# EAGLE board rev10 (EAGLE 7.5.0)
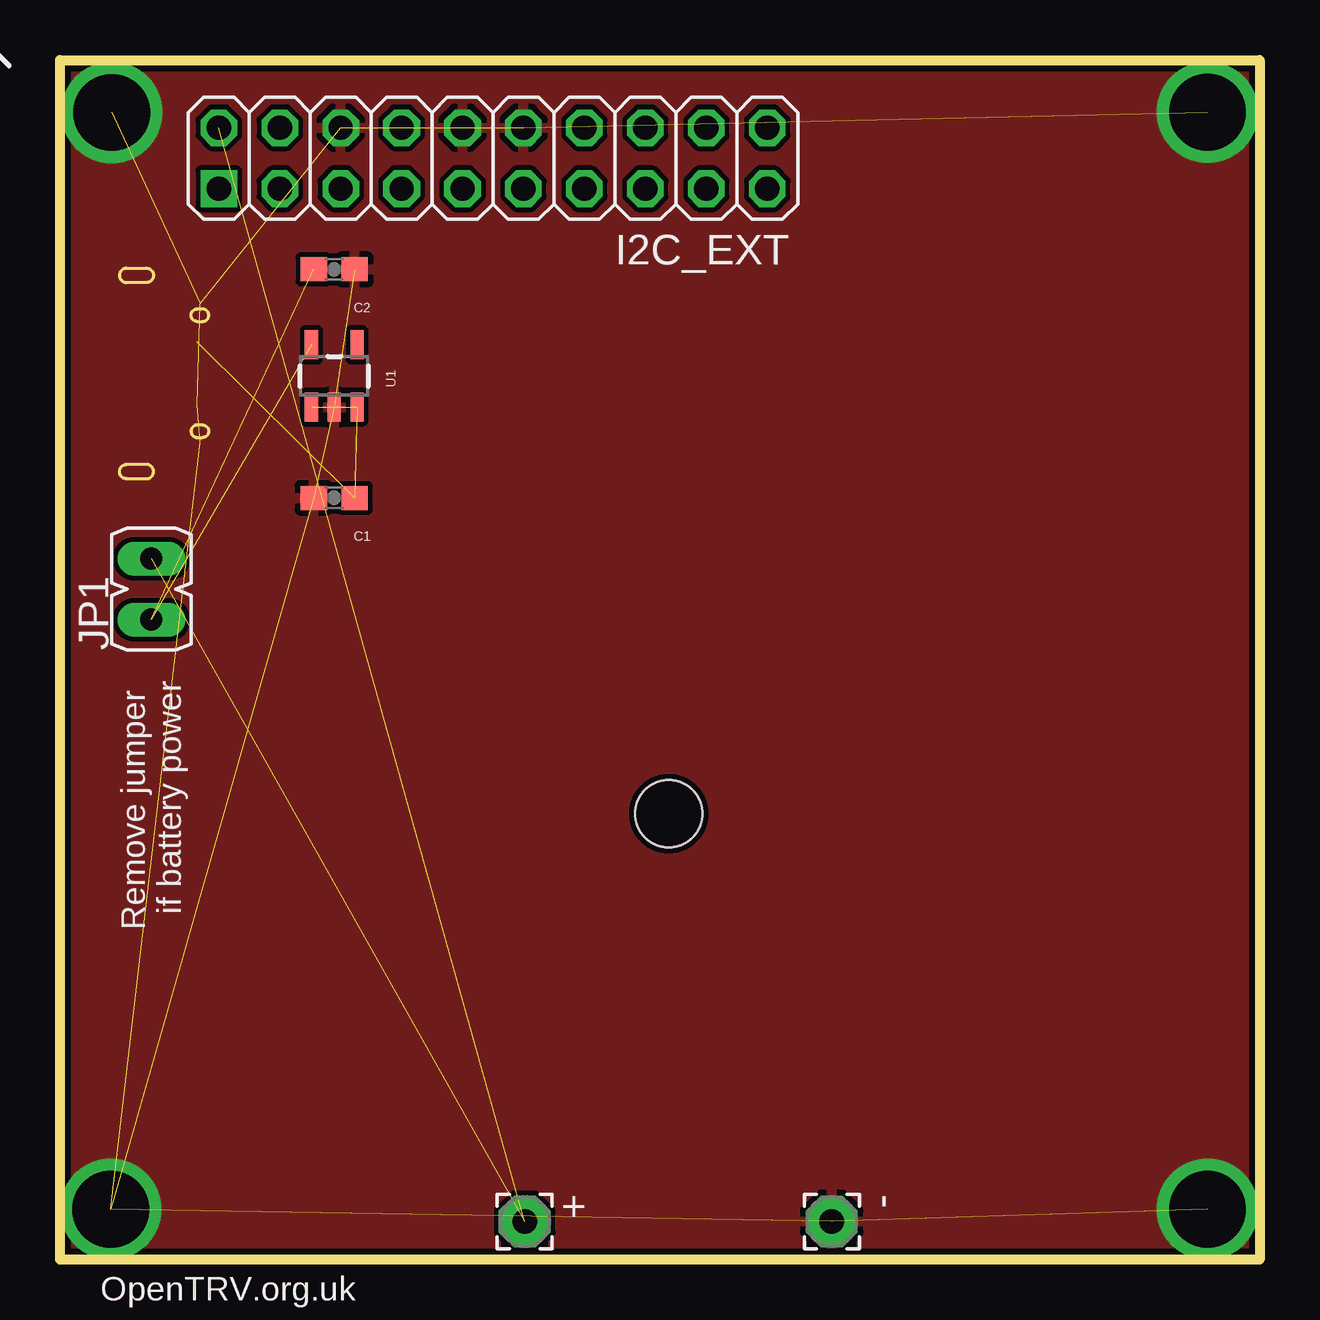
[diagram p0: board, top side]
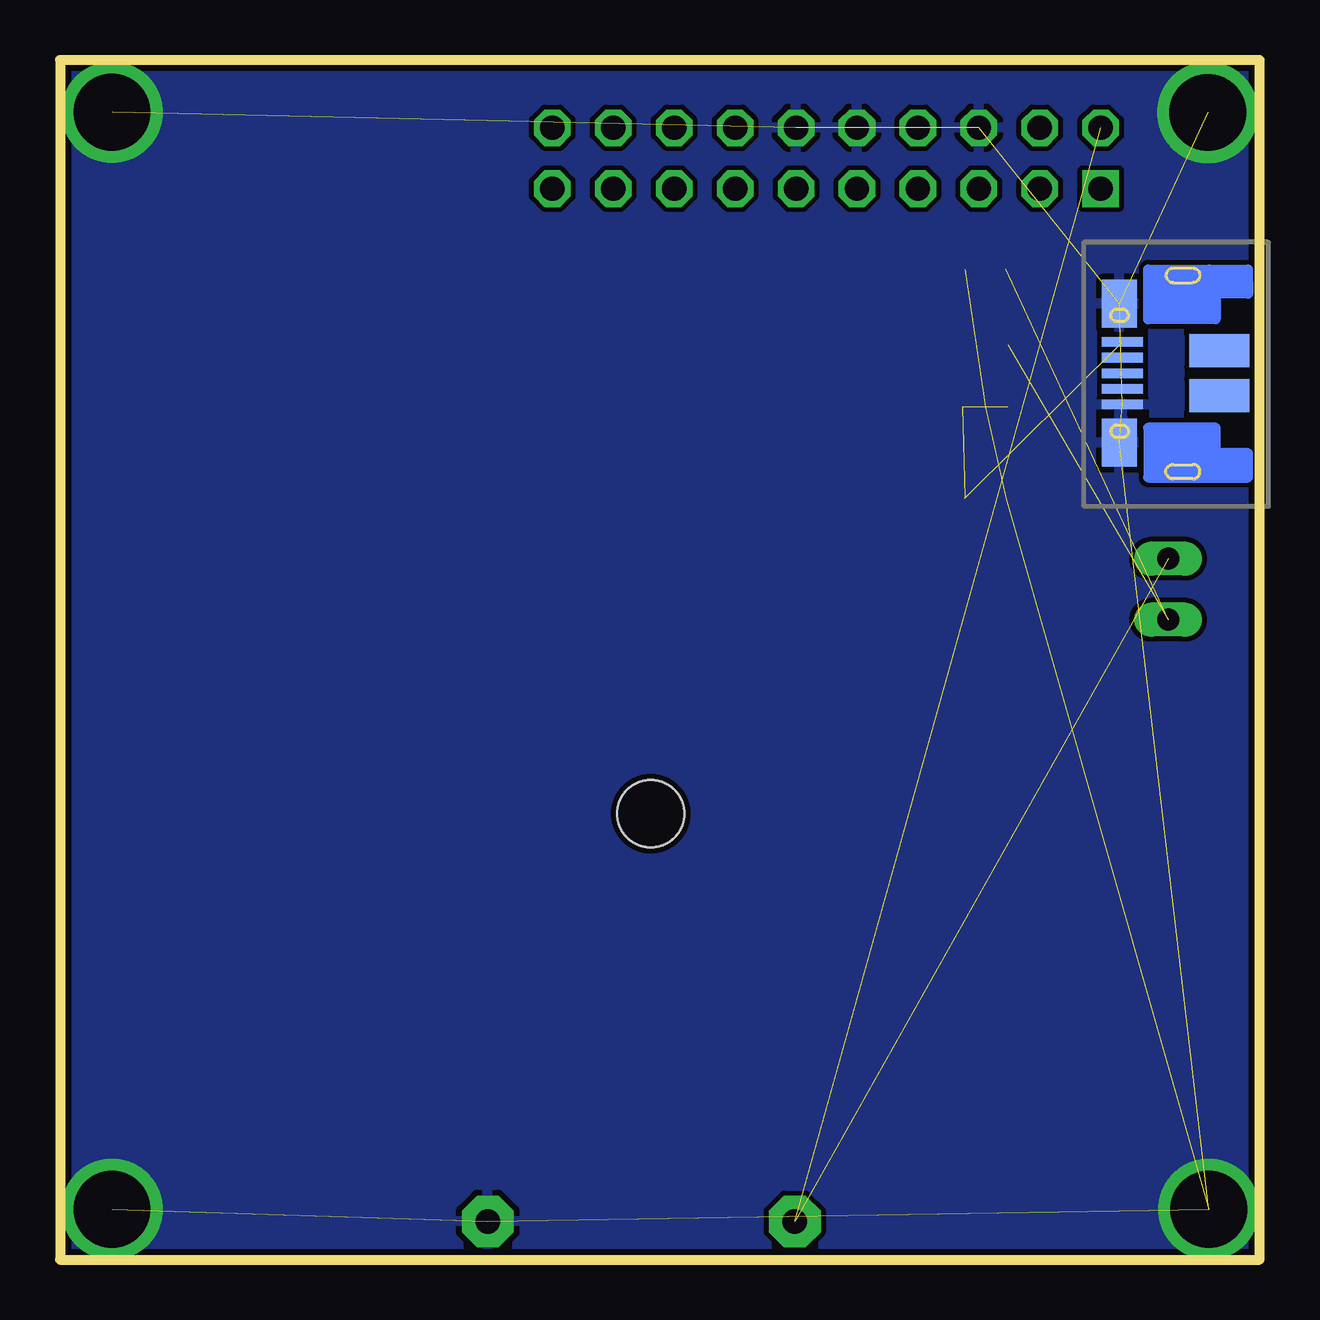
[diagram p1: board, bottom side, seen from below]

Size 50 x 50 mm. Coordinates in mm from the lower left corner, seen from the top.
Outline: 0,0 0,50 50,50 50,0 0,0
Copper layers (1*16): Top 0.035mm / dielectric 1.5mm / Bottom 0.035mm
Design rules "PMServicesStd *": minimum track width 8mil, minimum drill 0.5mm, track to track 8mil, track to pad 8mil, pad to pad 8mil, via to via 8mil, smd to smd 0mil, copper to edge 10mil, drill to drill 10mil, minimum pad ring 10mil, minimum via ring 6mil, stop-mask expansion 2mil, vias tented up to drill 100mil, thermal gap 10mil
Net classes: 0 default: width 0.203 mm; 1 supply: width 0.406 mm, clearance 0.203 mm; 2 ant: width 2.184 mm
Holes 2.8 mm at 25.37,18.59

## Footprints (pad centres in the part's own frame; a part is rotated, then mirrored left to right if it is on the bottom)
2,15/1,0 = drill 1.016 pad 2.159 octagon: 1 0,0
0603-CAP = smd 1.1 x 1: 1 -0.85,0; 2 0.85,0
2X10 = drill 1.016 square: 1 -11.43,-1.27 | drill 1.016 octagon: 2 -11.43,1.27; 3 -8.89,-1.27; 4 -8.89,1.27; 5 -6.35,-1.27; 6 -6.35,1.27; 7 -3.81,-1.27; 8 -3.81,1.27; 9 -1.27,-1.27; 10 -1.27,1.27; 11 1.27,-1.27; 12 1.27,1.27; 13 3.81,-1.27; 14 3.81,1.27; 15 6.35,-1.27; 16 6.35,1.27; 17 8.89,-1.27; 18 8.89,1.27; 19 11.43,-1.27; 20 11.43,1.27
JP1 = drill 0.914 long: 1 0,-1.27; 2 0,1.27
TC1185 = smd 0.55 x 1.2: 1 -0.95,-1.3; 2 0,-1.3; 3 0.95,-1.3; 4 0.95,1.3; 5 -0.95,1.3
MICRO-USB-FCI-10103592 = smd 0.4 x 1.71: 1 3.84,2.51; 2 3.19,2.51; 3 2.54,2.51; 4 1.89,2.51; 5 1.24,2.51 | smd 2 x 1.46: 7 -0.36,2.64; 17 5.44,2.64 | smd 1.375 x 2.5: 11 1.603,-1.52; 12 3.478,-1.52

## Placement (x,y rotation side)
+  [2,15/1,0]  19.37,1.58 270 top
-  [2,15/1,0]  32.17,1.58 270 top
C1  10uF 10V  [0603-CAP]  11.43,31.75 180 top
C2  10uF 10V  [0603-CAP]  11.43,41.27 180 top
I2C_EXT  [2X10]  18.05,45.91 0 top
JP1  [JP1]  3.81,27.94 0 top
U1  TC1185SMD  [TC1185]  11.43,36.83 0 top
U$1  [OSHW_10X200_NOTEXT]  -10.73,16.03 0 top  (outside the outline)
U$2  [TONNE]  -9.03,53.76 0 top  (outside the outline)
USBPOWER  MICRO-USB-FCI-10103592  [MICRO-USB-FCI-10103592]  3.2,34.4 90 bottom

## Library data of the parts
+ - = wirepad
C1 C2 = SparkFun-Passives
I2C_EXT = pinhead
JP1 = jumper
U1 = 3.3VREG
U$1 = ohw-logo
U$2 = logo
USBPOWER = micro-usb-fci-10103592

## Nets
5V [supply]: C1.1 U1.1 U1.3 USBPOWER.1
GND [supply]: -.1 C1.2 C2.1 I2C_EXT.6 I2C_EXT.10 I2C_EXT.12 U1.2 USBPOWER.5 USBPOWER.7 USBPOWER.17
N$8 [supply]: C2.2 JP1.1 U1.5
VCC [supply]: +.1 I2C_EXT.2 JP1.2

## Tracks (layer width: path | path; a pad name or v marks a point on that pad's centre or on a via)
5V  (3 unrouted)
GND  (via drill 3.2)  (13 unrouted)
  other vias: 2.16,47.81 47.83,47.82 47.83,2.1 2.11,2.1
  pour Bottom: 0,50 0,0 50,0 50,50
  pour Top: 0,50 0,0 50,0 50,50
N$8  (2 unrouted)
VCC  (2 unrouted)

## Text on the board
bPlace: License: http://goo.gl/3d71UJ
tNames: Remove jumper / if battery power | 20151208 | OpenTRV.org.uk